# Altium PCB PCB1.PcbDoc (part 2 of 2)
Units mil, origin at the board's own origin, x right, y up, seen from the top; angles counter-clockwise.
Board outline 3551.03 x 3776.23 mil, 2 copper layers (Top Layer, Bottom Layer); 216 components, 234 nets, 1586 pads, 0 vias.
Unrouted connection lines stored in the file: 528.
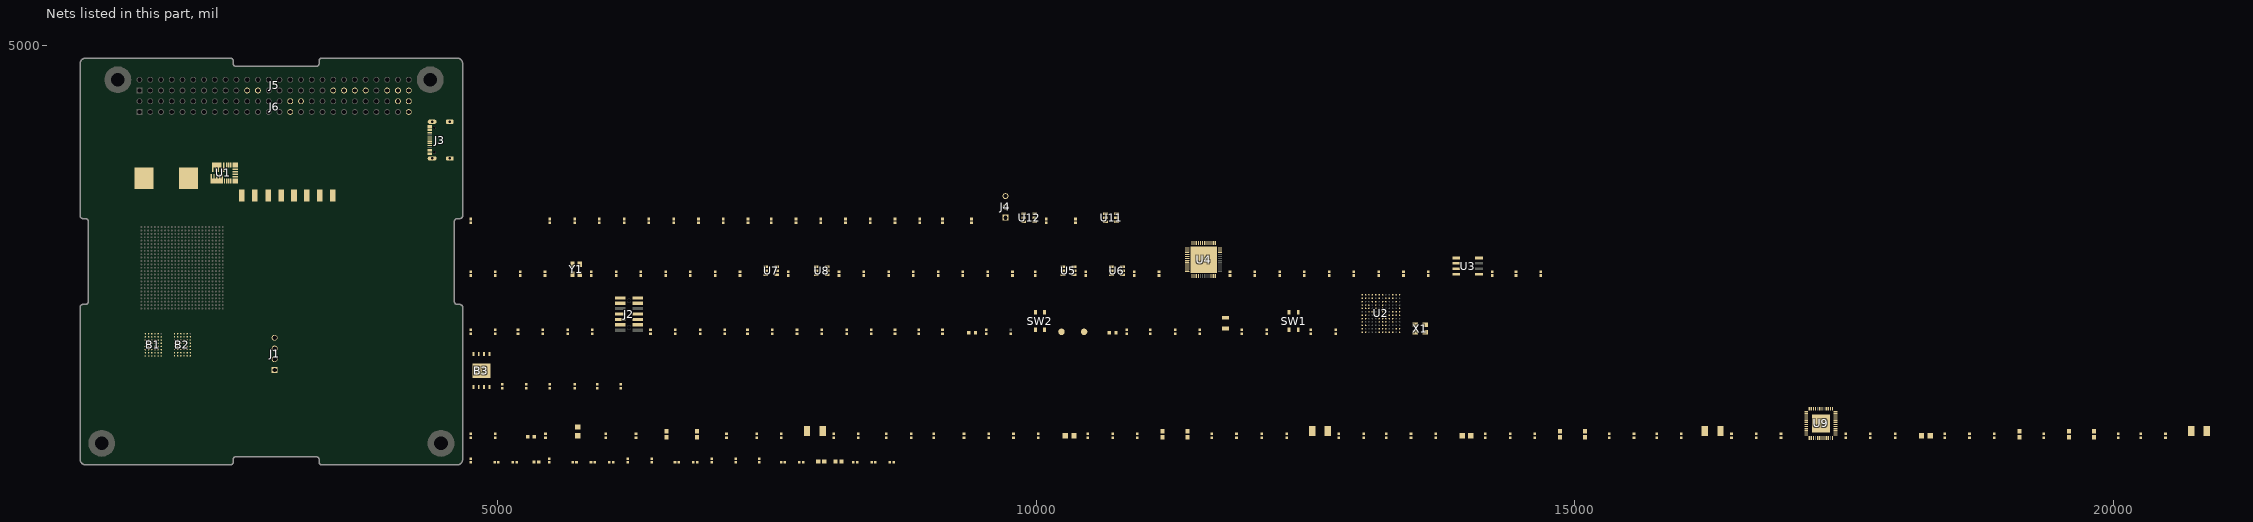
[diagram p2: the nets of this part, all layers, seen from the top]

## Part data
B1 B2: library part "IC SRAM 32MBIT PARALLEL 48TFBGA", "SRAM - Asynchronous Memory IC 32Mbit Parallel 10 ns 48-TFBGA (6x8)", Manufacturer_Name="Integrated Silicon Solution Inc.", Manufacturer_Part_Number=IS61WV204816BLL-10BLI, Mouser Part Number=870-WV204816BLL10BLI, Datasheet Link=http://www.issi.com/WW/pdf/61-64WV204816BLL.pdf, Geometry.Height=1.2mm, Mouser Price/Stock=https://www.mouser.co.uk/ProductDetail/ISSI/IS61WV204816BLL-10BLI?qs=cttFivMKqWygmzV9oE9bxA%3D%3D, PN=IS61WV204816ALL-12BLI
B3: library part "IC FLASH 2GBIT SPI/QUAD 8WSON", "FLASH - NAND (SLC) Memory IC 2Gbit SPI - Quad I/O 104 MHz 7 ns 8-WSON (8x6) / PN: W25N02KVZEIR", Manufacturer_Name=Winbond, Mouser Part Number=454-W25N02KVZEIR, Datasheet Link=https://www.winbond.com/resource-files/W25N02KVxxIRU_Datasheet_20210625_G.pdf, Geometry.Height=0.8mm, Manufacturer_Part_Number=W25N02KVZEIR, Mouser Price/Stock=https://www.mouser.co.uk/ProductDetail/Winbond/W25N02KVZEIR?qs=YwPsRIUVAOeLKi4%2F%2FEoBOQ%3D%3D, PN=W25N02KVZEIR
C1 C2 C74: "CAP SMD 0603 MLCC GERAL 10uF 10V ±10% X7R PN: GRM188Z71A106KA73D", Tolerance=10%, Voltage=10V, PN=GRM188Z71A106KA73D, SIZE=0603
C3: library part "CAP SMD 0402 1uF 25V ±10%", "CAP SMD 0402 MLCC GERAL 1uF 25V ±10% 0402 X5R PN:GRM155R61E105KA12D MURATA", Tolerance=10%, Voltage=25V, PN=GRM155R61E105KA12D, SIZE=0402
C4 C11 C14 C17 C19 C21 C68 C80 C82 C86 C91 C92 C100 C102: library part "CAP CER 0.1UF 16V X7R 0402", "0.1 µF ±10% 16V Ceramic Capacitor X7R 0402 (1005 Metric) / PN: GRM155R71C104KA88J", CAPACITANCE=0.1uF, Mfr_Name=Murata, PN=GRM155R71C104KA88J
C5 C6 C7 C8: library part "CAP SMD 1210 100uF 6.3V X7S ±20%", "CAP SMD 1210 MLCC GERAL 100uF 6.3V ±20% X7S PN: GRM31CD80J107MEA8K", Tolerance=20%, Voltage=6.3V, PN=GRT32EC70J107ME13L, SIZE=1210
C9: library part "CAP CER 0.47UF 16V X7S 0402", "0.1 µF ±10% 16V Ceramic Capacitor X7R 0402 (1005 Metric) / PN: CGA2B1X7S1C474K050BC", CAPACITANCE=0.47uF, Mfr_Name=Murata, PN=CGA2B1X7S1C474K050BC
C10 C36 C55 C61 C64 C73 C79: library part "CAP CER 4.7UF 25V X5R 0402", "CAP SMD 0402 MLCC GERAL 4.7uF 25V ±20% 0402 X5s PN: GRM155D81C475ME15J MURATA", Tolerance=20%, Voltage=25V, PN=GRM155D81C475ME15J, SIZE=0402
C12 C38 C41: library part "CAP CER 1UF 6.3V X5R 0402", "1 µF ±10% 6.3V Ceramic Capacitor X5R 0402 (1005 Metric)", Tolerance=10%, Voltage=6.3V, PN=JMK105BJ105KV-F, SIZE=0402
C13 C15: library part "CAP CER 10000PF 16V X7R 0402", "10000 pF ±10% 16V Ceramic Capacitor X7R 0402 (1005 Metric)", Tolerance=10%, Voltage=16V, PN=GRM155R71C103KA01D, SIZE=0402
C16 C18 C20: "10 µF ±20% 6.3V Ceramic Capacitor X5R 0402 (1005 Metric) / PN: GRM155R60J106ME05D", CAPACITANCE=10uF, Mfr_Name=Murata, PN=GRM155R60J106ME05D, Type="Ceramic Capacitors"
C22 C23: library part "CAP CER 6.8PF 25V C0G/NP0 01005", "6.8 pF ±0.25pF 25V Ceramic Capacitor C0G, NP0 01005 (0402 Metric)", Tolerance=5%, Voltage=25V, PN=GRM0225C1E6R8CA03L, SIZE=0402
C24 C27 C28 C29 C30 C31 C32 C33 C34 C35 C37 C40 C43 C45 C46 C47 C48 C49 C51 C52 C53 C54 C56 C57 C58 C59 C60 C62 C63 C65 C77 C81 C89 C98 C108 C110 C111 C112 C113: library part "CAP CER 0.1UF 25V X5R 0402", "0.1 µF ±10% 25V Ceramic Capacitor X5R 0402 (1005 Metric)", Tolerance=10%, Voltage=25V, PN=GRM155R61E104KA87D, SIZE=0402
C25 C26: library part "CAP CER 5.6PF 50V C0G/NPO 0402", "5.6 pF ±0.1pF 50V Ceramic Capacitor C0G, NP0 0402 (1005 Metric)", Tolerance=1%, Voltage=50V, PN=CC0402BRNPO9BN5R6, SIZE=0402
C39: library part "CAP CER 2.2UF 10V X5R 0402", "2.2 µF ±20% 10V Ceramic Capacitor X5R 0402 (1005 Metric)", Tolerance=20%, Voltage=10V, PN=885012105013, SIZE=0402
C42 C50: library part "CAP CER 10nF 25V X7R 0402", "10000 pF ±10% 25V Ceramic Capacitor X7R 0402 (1005 Metric)", Tolerance=10%, Voltage=25V, PN=KGM05AR71E103KH, SIZE=0402
C44: library part "CAP CER 4.7UF 10V X5R 0402", "CAP SMD 0402 MLCC GERAL 4.7uF 25V ±20% 0402 X5s PN: GRM155D81C475ME15J MURATA", Tolerance=20%, Voltage=25V, PN=GRM155D81C475ME15J, SIZE=0402
C66 C67: library part "CAP CER 18PF 50V C0G/NP0 0402", "18 pF ±5% 50V Capacitor de cerâmica C0G, NP0 0402 (métrico 1005)PN:GRM1555C1H180JA01D MURATA", Tolerance=5%, Voltage=50V, PN=GRM1555C1H180JA01D, SIZE=0402
C69 C70 C83 C84 C93 C94 C103 C104: library part "CAP CER 22UF 10V X5R 0603", "22 µF ±20% 10V Ceramic Capacitor X5R 0603 (1608 Metric)", Tolerance=20%, Voltage=10V, PN=GRM188R61A226ME15D, SIZE=0603
C71 C85 C95 C105: library part "CAP CER 56PF 50V C0G/NP0 0402", "56 pF ±5% 50V Ceramic Capacitor C0G, NP0 0402 (1005 Metric)", Tolerance=5%, Voltage=50V, PN=GCM1555C1H560JA16D, SIZE=0402
C72: library part "CAP CER 3.3UF 10V X5R 0402", "3.3 µF ±10% 10V Ceramic Capacitor X5R 0402 (1005 Metric)", Tolerance=10%, Voltage=10V, PN=C1005X5R1A335K050BC, SIZE=0402
C75 C87 C96 C106: library part "CAP CER 22PF 50V C0G/NPO 0402", "22 pF ±5% 50V Ceramic Capacitor C0G, NP0 0402 (1005 Metric)", Tolerance=5%, Voltage=50V, PN=GRM1555C1H220JA01D, SIZE=0402
C76 C88 C97 C107: library part "CAP CER 22UF 35V X5R 0805", "22 µF ±20% 35V Ceramic Capacitor X5R 0805 (2012 Metric)", Tolerance=20%, Voltage=35V, PN=C2012X5R1V226M125AC, SIZE=0603
C78 C90 C99 C109: library part "CAP CER 4700PF 50V X7R 0402", "4700 pF ±10% 50V Capacitor de cerâmica X7R 0402 PN: GRM155R71H472KA01D", Tolerance=10%, Voltage=50V, PN=GRM155R71H472KA01D, SIZE=0402
C101: library part "CAP CER 5PF 50V C0G/NP0 0402", "5 pF ±0.1pF 50V Ceramic Capacitor C0G, NP0 0402 (1005 Metric)", Tolerance=2%, Voltage=50V, PN=C1005X5R1A335K050BC, SIZE=0402
D1: library part "LED GREEN 0402 SMD", "Green 572nm LED Indication - Discrete 1.95V 0402 (1005 Metric)", ID=?, PN=LNJ347W83RA
D2 D3 D4: library part "LED SMD VD 0603", "LED SMD VD ALTO BRILHO 1,6x0,8x0,8mm 430mcd PN:150060GS75000 0603 WURTH", ID=?, PN=150060GS75000
FB1 FB2 FB3: library part "FERRITE BEAD 1.8K OHM 0402 1LN", "FERRITE BEAD 1.8K OHM 0402 1LN PN: BLM15HD182SN1D", Mfr_Name=Murata, PN=BLM15HD182SN1D
J2: "CONN HEADER SMD 14POS 1.27MM PN: FTSH-107-01-L-DV-K-A", Package=None, Availability=Bad, MF="Samtec Inc.", PN=FTSH-107-01-L-DV-K-A, Price=None, SnapEDA_Link=https://www.snapeda.com/parts/FTSH-107-01-L-DV-K-A/Samtec%20Inc./view-part/2791957/?ref=snap
J3: "CONN RCP USB2.0 TYP C 24P SMD RA PN: USB4105-GF-A", Package=None, Availability=Unavailable, MF="{'manufacturer': u'GCT'}", PN=USB4105-GF-A, Price=None
J5 J6: library part "CONN SOCKET 52POS 0.1 GOLD PCB", "CONN SOCKET 52POS 0.1 GOLD PCB PN: ESQ-126-39-G-D", Package=None, Availability=Unavailable, MF=Samtec, PN=ESQ-126-39-G-D, Price=None, SnapEDA_Link=https://www.snapeda.com/parts/ESQ-126-39-G-D/Samtec%20Inc./view-part/490181/?ref=snap
L1: library part "IND 470NH 30A 0.67 MOHM", "FIXED IND 470NH 30A 0.67 MOHM PN: 744355147", Package=None, Availability=Unavailable, MF="{'manufacturer': u'W\xfcrth Elektronik'}", PN=744355147, Price=None
L2 L3 L4 L5: "FIXED IND 2.2UH 4A 61 MOHM SMD PN: SRP4020TA-2R2M", Package="1608 ICS", Part Number=SRP4020TA-2R2M, DigiKey-Purchase-URL=https://snapeda.com/shop?store=DigiKey&id=4221634, MF="Murata Electronics", Mouser-Purchase-URL=https://snapeda.com/shop?store=Mouser&id=4221634, PN=SRP4020TA-2R2M, SnapEDA_Link=https://www.snapeda.com/parts/DFE18SAN1R0ME0L/Applied%20Avionics/view-part/4221634/?ref=snap
NP1 NP2 NP3 NP4 NP5 NP6 NP7: library part "RES SMD 0402 NP", "RES SMD 0402 NP", PACK=0402
R1 R6 R10 R34 R39 R50 R51 R54 R55: library part "RES SMD 0402 0R 0.063W ±1%", "RES SMD GERAL FILM 0R 0.063W ±1% 0402 7\" TAPE PN: RMCF0402ZT0R00 STACKPOLE", POWER=0.063W, Tolerance=1%, PACK=0402, PN=RMCF0402ZT0R00
R2 R49: library part "RES SMD 0402 2.2R 0.063W ±1%", "RES SMD GERAL FILM 2.2R 0.063W ±1% 0402 7\" TAPE PN: RC0402FR-072R2L", POWER=0.063W, Tolerance=1%, PACK=0402, PN=RC0402FR-072R2L
R3 R7 R11 R12 R13 R14 R19 R20 R21 R23 R35 R38 R43: library part "RES 10K OHM 1% 1/16W 0402", "10 kOhms ±1% 0,063W, 1/16W Resistor de chip 0402 (métrico 1005) Resistente à umidade Filme grosso", POWER=0.063W, Tolerance=1%, PACK=0402, PN=RC0402FR-0710KL
R4 R5: library part "RES SMD 4K99 OHM 1% 1/16W 0402", "4.99 kOhms ±0.1% 0.063W, 1/16W Chip Resistor 0402 (1005 Metric) Automotive AEC-Q200 Thin Film", Mfr_Name=Yageo, Resistence=4.99k, Tolerance=1%, PN=RMCF0402FT4K99
R8: library part "RES SMD 0402 200R 0.063W ±1%", "RES SMD GERAL FILM 200R 0.063W ±1% 0402 7\" TAPE PN: CRCW0402200RFKED", POWER=0.063W, Tolerance=1%, PACK=0402, PN=CRCW0402200RFKED
R9: library part "RES SMD 0402 309R 0.063W ±1%", "RES SMD GERAL FILM 309R 0.063W ±1% 0402 7\" TAPE PN: RC0402FR-072R2L", POWER=0.063W, Tolerance=1%, PACK=0402, PN=RC0402FR-07309RL
R15 R16 R17 R18: library part "RES 1K OHM 1% 1/16W 0402", "1 kOhms ±1% 0.063W, 1/16W Chip Resistor 0402 (1005 Metric) Moisture Resistant Thick Film", POWER=0.063W, Tolerance=1%, PACK=0402, PN=RC0402FR-071KL
R22: library part "RES SMD 0402 2K 0.063W ±1%", "RES SMD GERAL FILM 2K 0.063W ±1% 0402 7\" TAPE PN: RMCF0402FT2K00 STACKPOLE", POWER=0.063W, Tolerance=1%, PACK=0402, PN=RMCF0402FT2K00
R24: library part "RES SMD 0402 12K 0.063W ±1%", "RES SMD GERAL FILM 12K 0.063W ±1% 0402 7\" TAPE PN: RMCF0402FT12K0", POWER=0.063W, Tolerance=1%, PACK=0402, PN=RMCF0402FT12K0
R25 R26: library part "RES SMD 0402 5.1K OHM 1% 1/16W", "RES SMD 0402 5.1K OHM 1% 1/16W 0402 PN: RMCF0402FT5K10", POWER=0.063W, Tolerance=0.1%, PACK=0402, PN=RMCF0402FT5K10
R27 R31: library part "RES SMD 75K OHM 0.1% 1/16W 0402", "75 kOhms ±0.1% 0.063W, 1/16W Chip Resistor 0402 (1005 Metric) Automotive AEC-Q200 Thin Film", Mfr_Name=Panasonic, Resistence=75K, Tolerance=0.1%, PN=ERA-2AEB753X
R28 R32 R37 R44: library part "RES SMD 15K OHM 1% 1/10W 0402", "15 kOhms ±1% 0.1W, 1/10W Chip Resistor 0402 (1005 Metric) Automotive AEC-Q200 Thick Film", POWER=0.1W, Tolerance=1%, PACK=0402, PN=ERJ-2RKF1502X
R29 R33 R40: library part "RES SMD 24K OHM 0.1% 1/16W 0402", "24 kOhms ±0.1% 0.063W, 1/16W Chip Resistor 0402 (1005 Metric) Thin Film", Mfr_Name=Yageo, Resistence=24k, Tolerance=0.1%, PN=RT0402BRD0724KL
R30 R41 R45: library part "RES 10K OHM 5% 1/16W 0402", "10 kOhms ±5% 0.063W, 1/16W Chip Resistor 0402 (1005 Metric) Moisture Resistant Thick Film", Mfr_Name=Yageo, Resistence=10K, Tolerance=5%, PN=RC0402JR-0710KL
R36: library part "RES SMD 51K OHM 1% 1/10W 0402", "51 kOhms ±1% 0.1W, 1/10W Chip Resistor 0402 (1005 Metric) Automotive AEC-Q200 Thick Film", Mfr_Name=Panasonic, Resistence=51K, Tolerance=1%, PN=ERJ-2RKF5102X
R42: library part "RES 374K OHM 1% 1/16W 0402", "374 kOhms ±1% 0.063W, 1/16W Chip Resistor 0402 (1005 Metric) Moisture Resistant Thick Film", Mfr_Name=Yageo, Resistence=374K, Tolerance=1%, PN=RC0402FR-07374KL
R46: library part "RES SMD 20K OHM 1% 1/10W 0402", "20 kOhms ±1% 0.1W, 1/10W Chip Resistor 0402 (1005 Metric) Automotive AEC-Q200 Thick Film", Mfr_Name=Panasonic, Resistence=20K, Tolerance=1%, PN=ERJ-2RKF2002X
R47 R48: library part "RES SMD 0402 100K 0.063W ±1%", "RES SMD GERAL FILM 100K 0.063W ±1% 0402 7\" TAPE PN: RMCF0402FT100K", POWER=0.063W, Tolerance=1%, PACK=0402, PN=RMCF0402FT100K
R52 R53 R56: library part "RES SMD 0402 10K 0.063W ±1%", "RES SMD GERAL FILM 10K 0.063W ±1% 0402 7\" TAPE PN: RMCF0402FT10K0 STACKPOLE", POWER=0.063W, Tolerance=1%, PACK=0402, PN=RMCF0402FT10K0
SW1 SW2: library part "SWITCH TACTILE SPST-NO 0.05A 16V", "Interruptor tátil SPST-NA Top atuado Montagem em superfície", Mfr_Name="Alps Electric", PN=SKRPADE010, RefDes=RefDes, Type=Type
TP1 TP2: library part "PC TEST POINT MINIATURE BLACK", "PC TEST POINT MINIATURE BLACK PN: 5001", Package=None, Check_prices=https://www.snapeda.com/parts/5001/Keystone+Electronics/view-part/?ref=eda, MF="Keystone Electronics Corp.", PN=5001, SnapEDA_Link=https://www.snapeda.com/parts/5001/Keystone+Electronics/view-part/?ref=snap
U1: library part "IC REG BUCK ADJ 10A 16FC2QFN", "IC REG BUCK ADJ 10A 16FC2QFN PN:MAX20810AFE+", Manufacturer_Name="Analog Devices", Mouser Part Number=700-MAX20810AFE+, Datasheet Link=https://www.digikey.com/en/products/detail/analog-devices-inc-maxim-integrated/MAX20810AFE/22463000?msockid=2ab7f999c9c96f4c2a13ec8dc8dd6eef, Height=0.75mm, Mouser Price/Stock=https://www.mouser.co.uk/ProductDetail/Analog-Devices-Maxim-Integrated/MAX20810AFE%2b?qs=ST9lo4GX8V1Nvp4d0%2FgnXQ%3D%3D, PN=MAX20810AFE+
U2: "ARM® Cortex®-M4 STM32L4 Microcontroller IC 32-Bit Single-Core 120MHz 2MB (2M x 8) FLASH 144-UFBGA (10x10) PN: STM32L4R9ZIJ6", Mfr_Name=STMicroelectronics, PN=STM32L4R9ZIJ6, RefDes=RefDes, Type=Type
U3: library part "IC EEPROM 2KBIT MICROWIRE 8SOIC", "EEPROM CI de memória 2Kbit Microwire 2 MHz 8-SOIC. PN: 93LC56B-E/SN", Mfr_Name=Microchip, PN=93LC56B-E/SN, RefDes=RefDes, Type=Type
U4: "USB Bridge, USB to UART,FIFO USB 2.0 UART, FIFO Interface 48-QFN (8x8) PN: FT232HQ-REEL", Package="QFN-48 FTDI", Availability=Good, Check_prices=https://www.snapeda.com/parts/FT232HQ-REEL/FTDI,%20Future%20Technology%20Devices%20International%20Ltd/view-part/52946/?ref=eda, MF="FTDI, Future", MP=FT232HQ-REEL, PN=FT232HQ-REEL, Price=None, Purchase-URL=https://pricing.snapeda.com/search/part/FT232HQ-REEL/?ref=eda, SnapEDA_Link=https://www.snapeda.com/parts/FT232HQ-REEL/FTDI,%20Future%20Technology%20Devices%20International%20Ltd/view-part/52946/?ref=snap
U5 U6 U7 U8 U11 U12: library part "IC TRANSLATOR BIDIR SOT23-6", "Nível de tensão Tradutor Bidirecional 1 Circuito 1 Canal 500Mbps SOT-23-6. PN: SN74AXC1T45DBVR", Package="SOT-23-6 Texas Instruments", Availability="In Stock", Check_prices=https://www.snapeda.com/parts/SN74AXC1T45DBVR/Texas+Instruments/view-part/?ref=eda, MF="Texas Instruments", MP=SN74AXC1T45DBVR, PN=SN74AXC1T45DBVR, Price=None, Purchase-URL=https://pricing.snapeda.com/search/part/SN74AXC1T45DBVR/?ref=eda, SnapEDA_Link=https://www.snapeda.com/parts/SN74AXC1T45DBVR/Texas+Instruments/view-part/?ref=snap
U9: library part "IC REG BCK ADJ 4A/2A QUAD 48VQFN", "Buck CI regulador de chaveamento Positivo Ajustável 0,6V 4 Saída 4A, 2A 48-VFQFN pad exposto", Manufacturer_Name="Texas Instruments", Mouser Part Number=595-TPS65400RGZR, Datasheet Link=http://www.ti.com/lit/gpn/tps65400, Geometry.Height=1mm, Mouser Price/Stock=https://www.mouser.co.uk/ProductDetail/Texas-Instruments/TPS65400RGZR?qs=Lb6%252B0IsOw4%252Bg1%252BfY7t6%252Bmw%3D%3D, PN=TPS65400RGZR
U10: "IC FPGA 304 I/O 625-BGA/FCBGA PN: XCSU35P-1SBVB625I", Package=None, Availability=Unavailable, Check_prices=https://www.snapeda.com/parts/XCSU10P-2SBVB625I/AMD/view-part/?ref=eda, MF=AMD, PN=XCSU35P-1SBVB625I, Price=None, SnapEDA_Link=https://www.snapeda.com/parts/XCSU10P-2SBVB625I/AMD/view-part/?ref=snap
X1: library part "CRYSTAL 16.0000MHZ 8PF SMD", "16 MHz ±20ppm Crystal 8pF 80 Ohms 4-SMD, No Lead", Package="ECX-33Q-33Q-4 ECS", PN=STDCRG1-16M, SnapEDA_Link=https://www.snapeda.com/parts/ECS-160-8-33Q-JES-TR/ECS/view-part/?ref=snap
X2: library part "CRYSTAL 32.7680KHZ 6PF SMD", "32.768 kHz ±20ppm Crystal 6pF 70 kOhms 2-SMD, No Lead", Mfr_Name=NDK, PN=STDMUA14-32.768K, Type=Crystals
Y1: library part "CRYSTAL 12.0000MHZ 18PF SMD", "12 MHz ±20ppm Cristal 18pF 120 Ohms 4-SMD, sem condutores PN: ABM8-12.000MHZ-B2-T", Package="NON-STANDARD-4 Abracon", Availability="In Stock", Check_prices=https://www.snapeda.com/parts/ABM8-12.000MHZ-B2-T/Abracon+LLC/view-part/?ref=eda, MF=Abracon, MP=ABM8-12.000MHZ-B2-T, PN=ABM8-12.000MHZ-B2-T, Price=None, Purchase-URL=https://pricing.snapeda.com/search/part/ABM8-12.000MHZ-B2-T/?ref=eda, SnapEDA_Link=https://www.snapeda.com/parts/ABM8-12.000MHZ-B2-T/Abracon+LLC/view-part/?ref=snap

## Free pads (board coordinates)
  round 250 hole 125.98: 2(1325,1305) 2(1475,4680.2) 2(4375,4680.2) 2(4475,1305)

## Nets (pads, with @x,y where several pads share a name; then routed paths per layer and width w, separated by ;. In a path a pad name is that pad's centre, name@x,y a point inside that pad or via, vN(x,y) a via of type N, cw(c..) or ccw(c..) an arc to the next point about the centre after c; other vN are vias at no path point)
1.8V: B1.D6 B1.E1 B2.D6 B2.E1 C51.2 C52.2 C58.2 C59.2 U5.6 U6.6 U7.6 U8.6
1V2_DDR: C102.2 C103.2 C104.2 C105.2 C110.2 C111.2 L5.2 R45.2 U11.6 U12.6
2V5_DDR: C92.2 C93.2 C94.2 C95.2 L4.2 R36.2
3.3V: B3.8 C16.2 C17.2 C18.2 C19.2 C20.2 C21.2 C28.2 C29.2 C30.2 C31.2 C32.2 C33.2 C34.2 C35.2 C36.2 C37.2 C38.2 C40.2 C41.2 C42.2 C68.2 C69.2 C70.2 C71.2 C112.2 C113.2 J1.2 J2.03 L2.2 R3.2 R7.1 R11.1 R15.2 R16.2 R17.2 R18.2 R27.2 R43.2 U2.A6 U2.A11 U2.B1 U2.B2 U2.C11 U2.E12 U2.G1 U2.G12 U2.K2 U2.L1 U2.L11 U2.M2 U2.M6 U11.1 U11.5 U12.1
3.3V_FPGA: C82.2 C83.2 C84.2 C85.2 L3.2 R31.2
5V: C1.2 C2.2 C3.2 C4.2 FB3.2 J3.A4_B9 J3.B4_A9 NP2.2 U1.4 U1.15
+5V_CSKB: NP2.1 NP4.1 NP5.1 R47.2 R48.2 R54.1
AGND: C12.2 C15.1 R8.1 R9.1 R10.1 U1.6
BOOT: R12.2 U2.A4
BUTTOM: C24.1 R11.2 SW1.2 SW1.4 U2.A5
COMP1: C75.1 R28.1 U9.46
COMP2: C87.1 R32.1 U9.15
COMP3: C96.1 R37.1 U9.25
COMP4: C106.1 R44.1 U9.36
CSKB_SCL: NP3.1 R50.1
CSKB_SDA: NP1.1 R51.1
EECLK: R20.1 U3.2 U4.44
EECS: R19.1 U3.1 U4.45
EEDATA: R22.1 U3.3 U4.43
FLASH_CLK: B3.6
FLASH_CS: B3.1
FLASH_IO0: B3.5
FLASH_IO1: B3.2
FLASH_IO2: B3.3
FLASH_IO3: B3.7
FT232_VCCA_1.8V: C49.2 U4.37
FT232_VCCD_3.3V: C43.2 C44.2 C45.2 C46.2 C47.2 C48.2 C56.2 C57.2 C62.2 C63.2 FB1.1 FB2.1 R19.2 R20.2 R21.2 R23.2 U3.8 U4.12 U4.24 U4.39 U4.46 U5.1 U5.5 U6.1 U7.1 U7.5 U8.1 U8.5
FT232_VCORE_1.8V: C53.1 U4.38
FT232_VPHY_3.3V: C54.2 C55.2 FB1.2 U4.3
FT232_VPLL_3.3V: C60.2 C61.2 FB2.2 U4.8
FT232_VREGIN_5V: C64.2 C65.2 FB3.1 U4.40
FTDI_TCK: U4.13 U5.3
FTDI_TDI: U4.14 U7.3
FTDI_TDO: U4.15 U6.3
FTDI_TMS: U4.16 U8.3
GND: B1.D1 B1.E6 B2.D1 B2.E6 B3.4 B3.9 C1.1 C2.1 C3.1 C4.1 C10.1 C11.1 C14.1 C16.1 C17.1 C18.1 C19.1 C20.1 C21.1 C22.1 C23.2 C24.2 C25.2 C26.2 C27.1 C28.1 C29.1 C30.1 C31.1 C32.1 C33.1 C34.1 C35.1 C36.1 C37.1 C38.1 C39.1 C40.1 C41.1 C42.1 C43.1 C44.1 C45.1 C46.1 C47.1 C48.1 C49.1 C50.1 C51.1 C52.1 C53.2 C54.1 C55.1 C56.1 C57.1 C58.1 C59.1 C60.1 C61.1 C62.1 C63.1 C64.1 C65.1 C66.1 C67.1 C68.1 C69.1 C70.1 C72.1 C73.1 C74.1 C75.2 C76.1 C77.1 C78.2 C79.1 C81.1 C82.1 C83.1 C84.1 C87.2 C88.1 C89.1 C90.2 C92.1 C93.1 C94.1 C96.2 C97.1 C98.1 C99.2 C101.1 C102.1 C103.1 C104.1 C106.2 C107.1 C108.1 C109.2 C110.1 C111.1 C112.1 C113.1 D1.1 D2.1 D3.1 D4.1 J1.1 J2.05 J2.07 J2.11 J3.A1_B12 J3.B1_A12 J3.SH1 J3.SH2 J3.SH3 J3.SH4 J4.1 J6.29 J6.30 J6.32 R10.2 R12.1 R24.1 R25.1 R26.1 R29.1 R33.1 R40.1 R41.1 R42.1 R46.1 SW1.1 SW1.3 SW2.2 SW2.4 U1.16 U1.22 U1.23 U1.24 U1.25 U2.A1 U2.A7 U2.A12 U2.C1 U2.F11 U2.G2 U2.J10 U2.K1 U2.L6 U2.M1 U2.M12 U3.5 U4.4 U4.9 U4.10 U4.11 U4.22 U4.23 U4.35 U4.36 U4.41 U4.42 U4.47 U4.48 U4.49 U5.2 U6.2 U6.5 U7.2 U8.2 U9.7 U9.8 U9.21 U9.49 U11.2 U12.2 U12.5 X1.2 X1.4 Y1.2 Y1.4
MCU_A0: U2.E3
MCU_A1: U2.E2
MCU_A2: U2.E1
MCU_A3: U2.E5
MCU_A4: U2.F3
MCU_A5: U2.F4
MCU_A6: U2.G5
MCU_A7: U2.J6
MCU_A8: U2.M7
MCU_A9: U2.H6
MCU_A10: U2.L7
MCU_A11: U2.M8
MCU_A12: U2.F12
MCU_A13: U2.F7
MCU_A14: U2.F10
MCU_A15: U2.F8
MCU_A16: U2.G11
MCU_A17: U2.G9
MCU_A18: U2.G10
MCU_A19: U2.B3
MCU_A20: U2.D3
MCU_CS: U2.E7
MCU_D0: U2.G8
MCU_D1: U2.G7
MCU_D2: U2.C8
MCU_D3: U2.B8
MCU_D4: U2.G6
MCU_D5: U2.K7
MCU_D6: U2.J7
MCU_D7: U2.L8
MCU_D8: U2.H7
MCU_D9: U2.M9
MCU_D10: U2.J8
MCU_D11: U2.M10
MCU_D12: U2.K8
MCU_D13: U2.H10
MCU_D14: U2.H9
MCU_D15: U2.H8
MCU_LB: U2.A2
MCU_OE: U2.C7
MCU_UB: U2.C4
MCU_WE: U2.D7
NetC5_1: C5.1 C6.1 C7.1 C8.1 R6.1
NetC9_1: C9.1 U1.2
NetC9_2: C9.2 L1.1 U1.1 U1.17 U1.18 U1.19 U1.20 U1.21
NetC10_2: C10.2 C11.2 R2.2 U1.3
NetC12_1: C12.1 R2.1 U1.5
NetC13_1: C13.1 R4.1 R5.2 U1.12
NetC13_2: C13.2 R1.2 R4.2
NetC14_2: C14.2 R3.1 U1.14
NetC15_2: C15.2 R5.1 R6.2 U1.11
NetC39_2: C39.2 U2.L12
NetC50_2: C50.2 R23.1 U4.34
NetC78_1: C78.1 R28.2
NetC80_2: C80.2 U9.1
NetC81_2: C81.2 U9.45
NetC86_2: C86.2 U9.12
NetC90_1: C90.1 R32.2
NetC91_2: C91.2 U9.28
NetC99_1: C99.1 R37.2
NetC100_2: C100.2 U9.33
NetC101_2: C101.2 R42.2 U9.40
NetC109_1: C109.1 R44.2
NetD1_2: D1.2 R7.2 U1.13
NetD2_2: D2.2 R13.2
NetD3_2: D3.2 R14.1
NetD4_2: D4.2 R43.1 U9.17
NetJ1_3: J1.3 R18.1
NetJ1_4: J1.4 R17.1
NetJ3_A5: J3.A5 R26.2
NetJ3_B5: J3.B5 R25.2
NetJ4_2: J4.2 U12.3
NetJ4_3: J4.3 U11.3
NetJ5_21: J5.21 NP1.2
NetJ5_23: J5.23 NP3.2
NetJ5_41: J5.41 R50.2
NetJ5_43: J5.43 R51.2
NetJ5_47: J5.47 NP4.2
NetJ5_49: J5.49 R54.2
NetJ5_51: J5.51 NP5.2
NetJ6_50: J6.50 R55.1
NetJ6_51: J6.51 NP6.2
NetJ6_52: J6.52 NP7.1
NetNP6_1: NP6.1 NP7.2 R49.1 R55.2
NetQ1_4: R47.1
NetQ2_3: R48.1 R49.2
NetR8_2: R8.2 U1.7
NetR9_2: R9.2 U1.8
NetR13_1: R13.1 U2.B9
NetR15_1: R15.1 R53.1 U1.9 U2.A3 U9.42
NetR16_1: R16.1 R52.1 U1.10 U2.B4 U9.43
NetR21_1: R21.1 R22.2 U3.4
NetR24_2: R24.2 U4.5
NetR30_2: R30.2 U9.39
NetR34_1: R34.1 R35.2 U9.34
NetR34_2: R34.2 U9.24
NetR38_2: R38.2 R39.1
NetR39_2: R39.2 U9.37
NetR41_2: R41.2 U9.38
NetR56_2: R56.2
NetTP1_1: TP1.1 U2.C5
NetTP2_1: TP2.1 U2.D5
NetU5_4: U5.4
NetU6_4: U6.4
NetU7_4: U7.4
NetU8_4: U8.4
NetU9_27: U9.27
NetU11_4: U11.4
NetU12_4: U12.4
OSC32_IN: C26.1 U2.D1 X2.2
OSC32_OUT: C25.1 U2.D2 X2.1
OSC_IN: C22.2 U2.H1 X1.1
OSC_OUT: C23.1 U2.H2 X1.3
OSCI: C66.2 U4.1 Y1.1
OSCO: C67.2 U4.2 Y1.3
PD_BUS: C76.2 C77.2 C79.2 C88.2 C89.2 C97.2 C98.2 C107.2 C108.2 J5.37 J5.39 U9.5 U9.6 U9.22 U9.30 U9.31
RESET: C27.2 J2.12 SW2.1 SW2.3 U2.J1
SRAM_A0: B1.A3 B2.A3
SRAM_A1: B1.A4 B2.A4
SRAM_A2: B1.A5 B2.A5
SRAM_A3: B1.B3 B2.B3
SRAM_A4: B1.B4 B2.B4
SRAM_A5: B1.C3 B2.C3
SRAM_A6: B1.C4 B2.C4
SRAM_A7: B1.D4 B2.D4
SRAM_A8: B1.H2 B2.H2
SRAM_A9: B1.H3 B2.H3
SRAM_A10: B1.H4 B2.H4
SRAM_A11: B1.H5 B2.H5
SRAM_A12: B1.G3 B2.G3
SRAM_A13: B1.G4 B2.G4
SRAM_A14: B1.F3 B2.F3
SRAM_A15: B1.F4 B2.F4
SRAM_A16: B1.E4 B2.E4
SRAM_A17: B1.D3 B2.D3
SRAM_A18: B1.H1 B2.H1
SRAM_A19: B1.G2 B2.G2
SRAM_A20: B1.H6 B2.H6
SRAM_CS1: B1.B5
SRAM_CS2: B2.B5
SRAM_D0: B1.B6
SRAM_D1: B1.C5
SRAM_D2: B1.C6
SRAM_D3: B1.D5
SRAM_D4: B1.E5
SRAM_D5: B1.F5
SRAM_D6: B1.F6
SRAM_D7: B1.G6
SRAM_D8: B1.B1
SRAM_D9: B1.C1
SRAM_D10: B1.C2
SRAM_D11: B1.D2
SRAM_D12: B1.E2
SRAM_D13: B1.F2
SRAM_D14: B1.F1
SRAM_D15: B1.G1
SRAM_D16: B2.B6
SRAM_D17: B2.C5
SRAM_D18: B2.C6
SRAM_D19: B2.D5
SRAM_D20: B2.E5
SRAM_D21: B2.F5
SRAM_D22: B2.F6
SRAM_D23: B2.G6
SRAM_D24: B2.B1
SRAM_D25: B2.C1
SRAM_D26: B2.C2
SRAM_D27: B2.D2
SRAM_D28: B2.E2
SRAM_D29: B2.F2
SRAM_D30: B2.F1
SRAM_D31: B2.G1
SRAM_LB1: B1.A1
SRAM_LB2: B2.A1
SRAM_OE: B1.A2 B2.A2
SRAM_UB1: B1.B2
SRAM_UB2: B2.B2
SRAM_WE: B1.G5 B2.G5
SW1: C80.1 L2.1 U9.2 U9.3 U9.4
SW2: C86.1 L3.1 U9.9 U9.10 U9.11
SW3: C91.1 L4.1 U9.29
SW4: C100.1 L5.1 U9.32
SWDCLK: J2.06 U2.A10
SWDIO: J2.04 U2.B10
SWO: J2.08 U2.B6
USART2_RX: J2.13
USART2_TX: J2.14
USB_N: J3.A7 J3.B7 U4.6
USB_P: J3.A6 J3.B6 U4.7
VCC_3.3V: R52.2 R53.2 R56.1
VCCINT_1V: C5.2 C6.2 C7.2 C8.2 L1.2 R1.1
VDDD: C72.2 R30.1 R35.1 R38.1 U9.13 U9.20 U9.48
VDDDA: C73.2 U9.19
VDDDG: C74.2 U9.18
VFB1: C71.1 R27.1 R29.2 U9.47
VFB2: C85.1 R31.1 R33.2 U9.14
VFB3: C95.1 R36.1 R40.2 U9.26
VFB4: C105.1 R45.1 R46.2 U9.35
pads on no net: B1.A6 B1.E3 B2.A6 B2.E3 J2. J2.01 J2.02 J2.09 J2.10 J3. J3.A8 J3.B8 J5.01 J5.02 J5.03 J5.04 J5.05 J5.06 J5.07 J5.08 J5.09 J5.10 J5.11 J5.12 J5.13 J5.14 J5.15 J5.16 J5.17 J5.18 J5.19 J5.20 J5.22 J5.24 J5.25 J5.26 J5.27 J5.28 J5.29 J5.30 J5.31 J5.32 J5.33 J5.34 J5.35 J5.36 J5.38 J5.40 J5.42 J5.44 J5.45 J5.46 J5.48 J5.50 J5.52 J6.01 J6.02 J6.03 J6.04 J6.05 J6.06 J6.07 J6.08 J6.09 J6.10 J6.11 J6.12 J6.13 J6.14 J6.15 J6.16 J6.17 J6.18 J6.19 J6.20 J6.21 J6.22 J6.23 J6.24 J6.25 J6.26 J6.27 J6.28 J6.31 J6.33 J6.34 J6.35 J6.36 J6.37 J6.38 J6.39 J6.40 J6.41 J6.42 J6.43 J6.44 J6.45 J6.46 J6.47 J6.48 J6.49 R14.2 U2.A8 U2.A9 U2.B5 U2.B7 U2.B11 U2.B12 U2.C2 U2.C3 U2.C6 U2.C9 U2.C10 U2.C12 U2.D4 U2.D6 U2.D8 U2.D9 U2.D10 U2.D11 U2.D12 U2.E4 U2.E6 U2.E8 U2.E9 U2.E10 U2.E11 U2.F1 U2.F2 U2.F5 U2.F6 U2.F9 U2.G3 U2.G4 U2.H3 U2.H4 U2.H5 U2.H11 U2.H12 U2.J2 U2.J3 U2.J4 U2.J5 U2.J9 U2.J11 U2.J12 U2.K3 U2.K4 U2.K5 U2.K6 U2.K9 U2.K10 U2.K11 U2.K12 U2.L2 U2.L3 U2.L4 U2.L5 U2.L9 U2.L10 U2.M3 U2.M4 U2.M5 U2.M11 U3.6 U3.7 U4.17 U4.18 U4.19 U4.20 U4.21 U4.25 U4.26 U4.27 U4.28 U4.29 U4.30 U4.31 U4.32 U4.33 U9.16 U9.23 U9.41 U9.44 U10.A1 U10.A2 U10.A3 U10.A4 U10.A5 U10.A6 U10.A7 U10.A8 U10.A9 U10.A10 U10.A11 U10.A12 U10.A13 U10.A14 U10.A15 U10.A16 U10.A17 U10.A18 U10.A19 U10.A20 U10.A21 U10.A22 U10.A23 U10.A24 U10.A25 U10.AA1 U10.AA2 U10.AA3 U10.AA4 U10.AA5 U10.AA6 U10.AA7 U10.AA8 U10.AA9 U10.AA10 U10.AA11 U10.AA12 U10.AA13 U10.AA14 U10.AA15 U10.AA16 U10.AA17 U10.AA18 U10.AA19 U10.AA20 U10.AA21 U10.AA22 U10.AA23 U10.AA24 U10.AA25 U10.AB1 U10.AB2 U10.AB3 U10.AB4 U10.AB5 U10.AB6 U10.AB7 U10.AB8 U10.AB9 U10.AB10 U10.AB11 U10.AB12 U10.AB13 U10.AB14 U10.AB15 U10.AB16 U10.AB17 U10.AB18 U10.AB19 U10.AB20 U10.AB21 U10.AB22 U10.AB23 U10.AB24 U10.AB25 U10.AC1 U10.AC2 U10.AC3 U10.AC4 U10.AC5 U10.AC6 U10.AC7 U10.AC8 U10.AC9 U10.AC10 U10.AC11 U10.AC12 U10.AC13 U10.AC14 U10.AC15 U10.AC16 U10.AC17 U10.AC18 U10.AC19 U10.AC20 U10.AC21 U10.AC22 U10.AC23 U10.AC24 U10.AC25 U10.AD1 U10.AD2 U10.AD3 U10.AD4 U10.AD5 U10.AD6 U10.AD7 U10.AD8 U10.AD9 U10.AD10 U10.AD11 U10.AD12 U10.AD13 U10.AD14 U10.AD15 U10.AD16 U10.AD17 U10.AD18 U10.AD19 U10.AD20 U10.AD21 U10.AD22 U10.AD23 U10.AD24 U10.AD25 U10.AE1 U10.AE2 U10.AE3 U10.AE4 U10.AE5 U10.AE6 U10.AE7 U10.AE8 U10.AE9 U10.AE10 U10.AE11 U10.AE12 U10.AE13 U10.AE14 U10.AE15 U10.AE16 U10.AE17 U10.AE18 U10.AE19 U10.AE20 U10.AE21 U10.AE22 U10.AE23 U10.AE24 U10.AE25 U10.B1 U10.B2 U10.B3 U10.B4 U10.B5 U10.B6 U10.B7 U10.B8 U10.B9 U10.B10 U10.B11 U10.B12 U10.B13 U10.B14 U10.B15 U10.B16 U10.B17 U10.B18 U10.B19 U10.B20 U10.B21 U10.B22 U10.B23 U10.B24 U10.B25 U10.C1 U10.C2 U10.C3 U10.C4 U10.C5 U10.C6 U10.C7 U10.C8 U10.C9 U10.C10 U10.C11 U10.C12 U10.C13 U10.C14 U10.C15 U10.C16 U10.C17 U10.C18 U10.C19 U10.C20 U10.C21 U10.C22 U10.C23 U10.C24 U10.C25 U10.D1 U10.D2 U10.D3 U10.D4 U10.D5 U10.D6 U10.D7 U10.D8 U10.D9 U10.D10 U10.D11 U10.D12 U10.D13 U10.D14 U10.D15 U10.D16 U10.D17 U10.D18 U10.D19 U10.D20 U10.D21 U10.D22 U10.D23 U10.D24 U10.D25 U10.E1 U10.E2 U10.E3 U10.E4 U10.E5 U10.E6 U10.E7 U10.E8 U10.E9 U10.E10 U10.E11 U10.E12 U10.E13 U10.E14 U10.E15 U10.E16 U10.E17 U10.E18 U10.E19 U10.E20 U10.E21 U10.E22 U10.E23 U10.E24 U10.E25 U10.F1 U10.F2 U10.F3 U10.F4 U10.F5 U10.F6 U10.F7 U10.F8 U10.F9 U10.F10 U10.F11 U10.F12 U10.F13 U10.F14 U10.F15 U10.F16 U10.F17 U10.F18 U10.F19 U10.F20 U10.F21 U10.F22 U10.F23 U10.F24 U10.F25 U10.G1 U10.G2 U10.G3 U10.G4 U10.G5 U10.G6 U10.G7 U10.G8 U10.G9 U10.G10 U10.G11 U10.G12 U10.G13 U10.G14 U10.G15 U10.G16 U10.G17 U10.G18 U10.G19 U10.G20 U10.G21 U10.G22 U10.G23 U10.G24 U10.G25 U10.H1 U10.H2 U10.H3 U10.H4 U10.H5 U10.H6 U10.H7 U10.H8 U10.H9 U10.H10 U10.H11 U10.H12 U10.H13 U10.H14 U10.H15 U10.H16 U10.H17 U10.H18 U10.H19 U10.H20 U10.H21 U10.H22 U10.H23 U10.H24 U10.H25 U10.J1 U10.J2 U10.J3 U10.J4 U10.J5 U10.J6 U10.J7 U10.J8 U10.J9 U10.J10 U10.J11 U10.J12 U10.J13 U10.J14 U10.J15 U10.J16 U10.J17 U10.J18 U10.J19 U10.J20 U10.J21 U10.J22 U10.J23 U10.J24 U10.J25 U10.K1 U10.K2 U10.K3 U10.K4 U10.K5 U10.K6 U10.K7 U10.K8 U10.K9 U10.K10 U10.K11 U10.K12 U10.K13 U10.K14 U10.K15 U10.K16 U10.K17 U10.K18 U10.K19 U10.K20 U10.K21 U10.K22 U10.K23 U10.K24 U10.K25 U10.L1 U10.L2 U10.L3 U10.L4 U10.L5 U10.L6 U10.L7 U10.L8 U10.L9 U10.L10 U10.L11 U10.L12 U10.L13 U10.L14 U10.L15 U10.L16 U10.L17 U10.L18 U10.L19 U10.L20 U10.L21 U10.L22 U10.L23 U10.L24 U10.L25 U10.M1 U10.M2 U10.M3 U10.M4 U10.M5 U10.M6 U10.M7 U10.M8 U10.M9 U10.M10 U10.M11 U10.M12 U10.M13 U10.M14 U10.M15 U10.M16 U10.M17 U10.M18 U10.M19 U10.M20 U10.M21 U10.M22 U10.M23 U10.M24 U10.M25 U10.N1 U10.N2 U10.N3 U10.N4 U10.N5 U10.N6 U10.N7 U10.N8 U10.N9 U10.N10 U10.N11 U10.N12 U10.N13 U10.N14 U10.N15 U10.N16 U10.N17 U10.N18 U10.N19 U10.N20 U10.N21 U10.N22 U10.N23 U10.N24 U10.N25 U10.P1 U10.P2 U10.P3 U10.P4 U10.P5 U10.P6 U10.P7 U10.P8 U10.P9 U10.P10 U10.P11 U10.P12 U10.P13 U10.P14 U10.P15 U10.P16 U10.P17 U10.P18 U10.P19 U10.P20 U10.P21 U10.P22 U10.P23 U10.P24 U10.P25 U10.R1 U10.R2 U10.R3 U10.R4 U10.R5 U10.R6 U10.R7 U10.R8 U10.R9 U10.R10 U10.R11 U10.R12 U10.R13 U10.R14 U10.R15 U10.R16 U10.R17 U10.R18 U10.R19 U10.R20 U10.R21 U10.R22 U10.R23 U10.R24 U10.R25 U10.T1 U10.T2 U10.T3 U10.T4 U10.T5 U10.T6 U10.T7 U10.T8 U10.T9 U10.T10 U10.T11 U10.T12 U10.T13 U10.T14 U10.T15 U10.T16 U10.T17 U10.T18 U10.T19 U10.T20 U10.T21 U10.T22 U10.T23 U10.T24 U10.T25 U10.U1 U10.U2 U10.U3 U10.U4 U10.U5 U10.U6 U10.U7 U10.U8 U10.U9 U10.U10 U10.U11 U10.U12 U10.U13 U10.U14 U10.U15 U10.U16 U10.U17 U10.U18 U10.U19 U10.U20 U10.U21 U10.U22 U10.U23 U10.U24 U10.U25 U10.V1 U10.V2 U10.V3 U10.V4 U10.V5 U10.V6 U10.V7 U10.V8 U10.V9 U10.V10 U10.V11 U10.V12 U10.V13 U10.V14 U10.V15 U10.V16 U10.V17 U10.V18 U10.V19 U10.V20 U10.V21 U10.V22 U10.V23 U10.V24 U10.V25 U10.W1 U10.W2 U10.W3 U10.W4 U10.W5 U10.W6 U10.W7 U10.W8 U10.W9 U10.W10 U10.W11 U10.W12 U10.W13 U10.W14 U10.W15 U10.W16 U10.W17 U10.W18 U10.W19 U10.W20 U10.W21 U10.W22 U10.W23 U10.W24 U10.W25 U10.Y1 U10.Y2 U10.Y3 U10.Y4 U10.Y5 U10.Y6 U10.Y7 U10.Y8 U10.Y9 U10.Y10 U10.Y11 U10.Y12 U10.Y13 U10.Y14 U10.Y15 U10.Y16 U10.Y17 U10.Y18 U10.Y19 U10.Y20 U10.Y21 U10.Y22 U10.Y23 U10.Y24 U10.Y25

## Silkscreen, mask and mechanical layers (free items; w line width, h text height)
Board:
  lines w1: 1150.54,3391.61 cw(c1150.54,3417.15) 1125,3417.15 1125,4830.2 cw(c1175,4830.2) 1175,4880.2 2519.54,4880.2 ; 1175,3391.61 cw(c1175,3366.02) 1200.59,3366.02 1200.59,3179.31 1200.59,2805.89 1200.59,2619.17 cw(c1175,2619.17) 1175,2593.58 1150.54,2593.58 ccw(c1150.54,2568.04) 1125,2568.04 1125,1155 ccw(c1175,1155) 1175,1105 1236.42,1105 2519.54,1105 ; 2519.54,1105.03 ccw(c2519.54,1130.56) 2545.08,1130.56 2545.08,1155.03 cw(c2570.67,1155.03) 2570.67,1180.62 3317.52,1180.62 cw(c3317.52,1155.03) 3343.11,1155.03 3343.11,1130.56 ccw(c3368.65,1130.56) 3368.65,1105.03 ; 2519.54,4880.17 cw(c2519.54,4854.63) 2545.08,4854.63 2545.08,4830.17 ccw(c2570.67,4830.17) 2570.67,4804.58 3317.52,4804.58 ccw(c3317.52,4830.17) 3343.11,4830.17 3343.11,4854.63 cw(c3368.65,4854.63) 3368.65,4880.17 ; 3368.65,1105 4625,1105 ccw(c4625,1155) 4675,1155 4675,2568.04 ; 3368.65,4880.2 4625,4880.2 cw(c4625,4830.2) 4675,4830.2 4675,3417.15 ; 4674.97,2568.04 ccw(c4649.44,2568.04) 4649.44,2593.58 4624.97,2593.58 cw(c4624.97,2619.17) 4599.38,2619.17 4599.38,3366.02 cw(c4624.97,3366.02) 4624.97,3391.61 4649.44,3391.61 ccw(c4649.44,3417.15) 4674.97,3417.15
  lines w5: 1124.49,1154.99 ccw(c1175,1155) 1175,1104.48 ; 1124.49,1154.99 ccw(c1175,1155) 1175,1104.48 ; 1124.48,1154.99 1124.48,2568.04 ; 1124.48,1154.99 1124.48,2568.04 ; 1124.49,2568.04 cw(c1150.54,2568.04) 1150.54,2594.1 ; 1124.49,2568.04 cw(c1150.54,2568.04) 1150.54,2594.1 ; 1124.49,3417.14 ccw(c1150.54,3417.15) 1150.54,3391.1 ; 1124.49,3417.14 ccw(c1150.54,3417.15) 1150.54,3391.1 ; 1124.48,3417.15 1124.48,4830.2 ; 1124.48,3417.15 1124.48,4830.2 ; 1124.48,4830.2 cw(c1175,4830.2) 1175,4880.71 ; 1124.48,4830.2 cw(c1175,4830.2) 1175,4880.71 ; 1150.54,2594.1 1175,2594.1 ; 1150.54,2594.1 1175,2594.1 ; 1150.54,3391.1 1175,3391.1 ; 1175,1104.48 1236.42,1104.48 ; 1175,1104.48 1236.42,1104.48 ; 1175,2594.1 ccw(c1175,2619.17) 1200.08,2619.17 ; 1175,2594.1 ccw(c1175,2619.17) 1200.08,2619.17 ; 1175,3391.1 cw(c1175,3366.02) 1200.08,3366.02 ; 1175,3391.1 cw(c1175,3366.02) 1200.08,3366.02 ; 1175,4880.71 2519.54,4880.71 ; 1175,4880.71 2519.54,4880.71 ; 1200.08,2619.17 1200.08,3366.02 ; 1200.08,2619.17 1200.08,3366.02 ; 1236.42,1104.48 2519.54,1104.48 ; 1236.42,1104.48 2519.54,1104.48 ; 2519.54,1104.48 2519.7,1104.51 ; 2519.54,1104.48 2519.7,1104.51 ; 2519.54,4880.71 2519.7,4880.69 ; 2519.54,4880.71 2519.7,4880.69 ; 2519.7,1104.51 ccw(c2519.54,1130.56) 2545.59,1130.56 ; 2519.7,1104.51 ccw(c2519.54,1130.56) 2545.59,1130.56 ; 2519.7,4880.69 cw(c2519.54,4854.63) 2545.59,4854.63 ; 2519.7,4880.69 cw(c2519.54,4854.63) 2545.59,4854.63 ; 2545.59,1130.56 2545.59,1155.03 ; 2545.59,1130.56 2545.59,1155.03 ; 2545.59,1155.03 cw(c2570.67,1155.03) 2570.67,1180.1 ; 2545.59,1155.03 cw(c2570.67,1155.03) 2570.67,1180.1 ; 2545.59,4830.17 ccw(c2570.67,4830.17) 2570.67,4805.1 ; 2545.59,4830.17 ccw(c2570.67,4830.17) 2570.67,4805.1 ; 2545.59,4830.17 2545.59,4854.63 ; 2545.59,4830.17 2545.59,4854.63 ; 2570.67,1180.1 3317.52,1180.1 ; 2570.67,1180.1 3317.52,1180.1 ; 2570.67,4805.1 3317.52,4805.1 ; 2570.67,4805.1 3317.52,4805.1 ; 3317.52,1180.1 cw(c3317.52,1155.03) 3342.6,1155.03 ; 3317.52,1180.1 cw(c3317.52,1155.03) 3342.6,1155.03 ; 3317.52,4805.1 ccw(c3317.52,4830.17) 3342.6,4830.17 ; 3317.52,4805.1 ccw(c3317.52,4830.17) 3342.6,4830.17 ; 3342.6,1130.56 ccw(c3368.65,1130.56) 3368.49,1104.51 ; 3342.6,1130.56 ccw(c3368.65,1130.56) 3368.49,1104.51 ; 3342.6,1130.56 3342.6,1155.03 ; 3342.6,1130.56 3342.6,1155.03 ; 3342.6,4830.17 3342.6,4854.63 ; 3342.6,4830.17 3342.6,4854.63 ; 3342.6,4854.63 cw(c3368.65,4854.63) 3368.49,4880.69 ; 3342.6,4854.63 cw(c3368.65,4854.63) 3368.49,4880.69 ; 3368.49,1104.51 3368.65,1104.49 ; 3368.49,1104.51 3368.65,1104.49 ; 3368.49,4880.69 3368.65,4880.71 ; 3368.49,4880.69 3368.65,4880.71 ; 3368.65,1104.49 4625,1104.48 ; 3368.65,1104.49 4625,1104.48 ; 3368.65,4880.71 4625,4880.71 ; 3368.65,4880.71 4625,4880.71 ; 4599.9,2619.17 ccw(c4624.97,2619.17) 4624.97,2594.1 ; 4599.9,2619.17 ccw(c4624.97,2619.17) 4624.97,2594.1 ; 4599.9,2619.17 4599.9,3366.02 ; 4599.9,2619.17 4599.9,3366.02 ; 4599.9,3366.02 cw(c4624.97,3366.02) 4624.97,3391.1 ; 4599.9,3366.02 cw(c4624.97,3366.02) 4624.97,3391.1 ; 4624.97,2594.1 4649.44,2594.1 ; 4624.97,2594.1 4649.44,2594.1 ; 4624.97,3391.1 4649.44,3391.1 ; 4624.97,3391.1 4649.44,3391.1 ; 4625,1104.48 ccw(c4625,1155) 4675.52,1155 ; 4625,1104.48 ccw(c4625,1155) 4675.52,1155 ; 4625,4880.71 cw(c4625,4830.2) 4675.52,4830.2 ; 4625,4880.71 cw(c4625,4830.2) 4675.52,4830.2 ; 4649.44,2594.1 cw(c4649.44,2568.04) 4675.49,2568.2 ; 4649.44,2594.1 cw(c4649.44,2568.04) 4675.49,2568.2 ; 4649.44,3391.1 ccw(c4649.44,3417.15) 4675.49,3416.99 ; 4649.44,3391.1 ccw(c4649.44,3417.15) 4675.49,3416.99 ; 4675.52,1155 4675.51,2568.04 ; 4675.52,1155 4675.51,2568.04 ; 4675.51,2568.04 4675.49,2568.2 ; 4675.51,2568.04 4675.49,2568.2 ; 4675.49,3416.99 4675.51,3417.15 ; 4675.49,3416.99 4675.51,3417.15 ; 4675.51,3417.15 4675.52,4830.2 ; 4675.51,3417.15 4675.52,4830.2